# Altium PCB PCB1.PcbDoc (part 1 of 2)
Units mm, origin at the board's own origin, x right, y up, seen from the top; angles counter-clockwise.
Board outline 20 x 26.04 mm, 2 copper layers (Top Layer, Bottom Layer); 21 components, 12 nets, 62 pads, 45 vias.
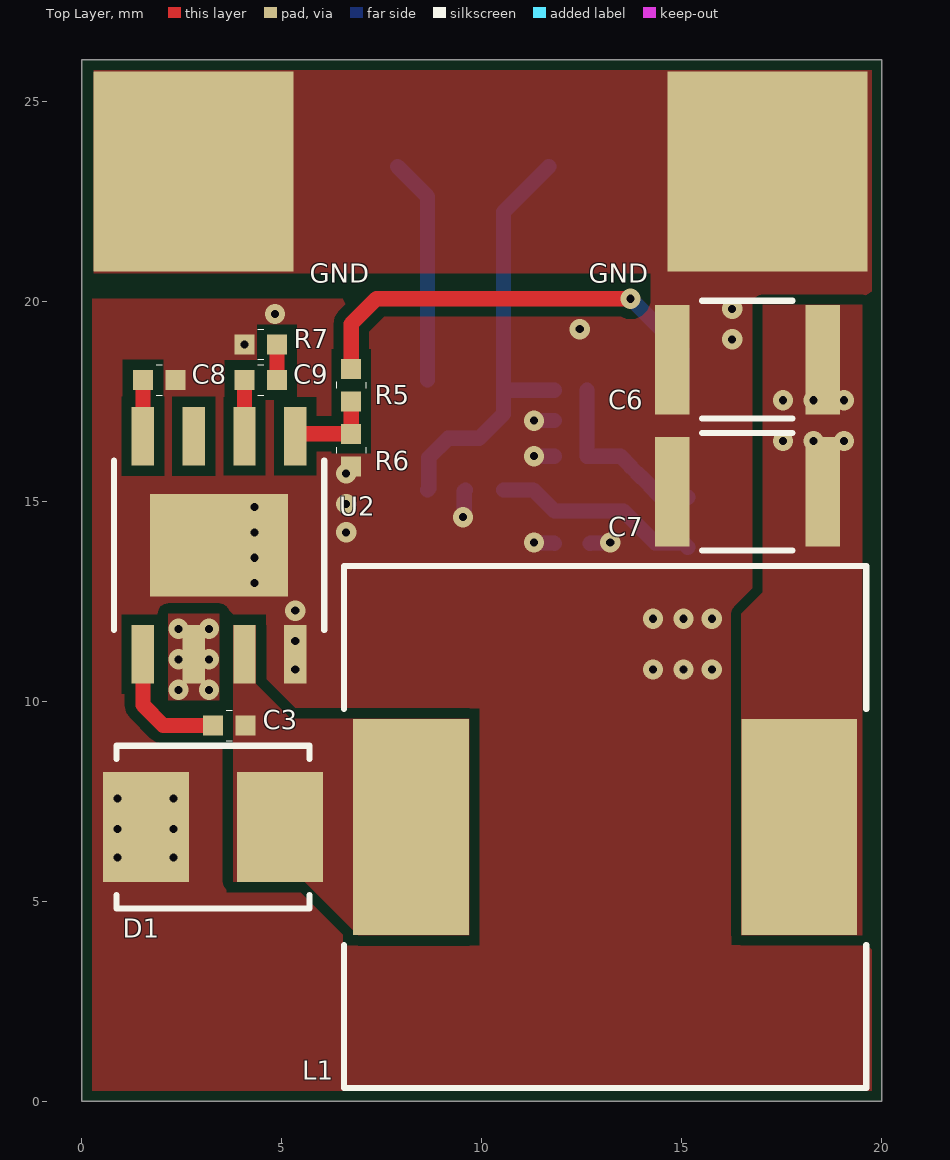
[diagram p0: Top Layer view]
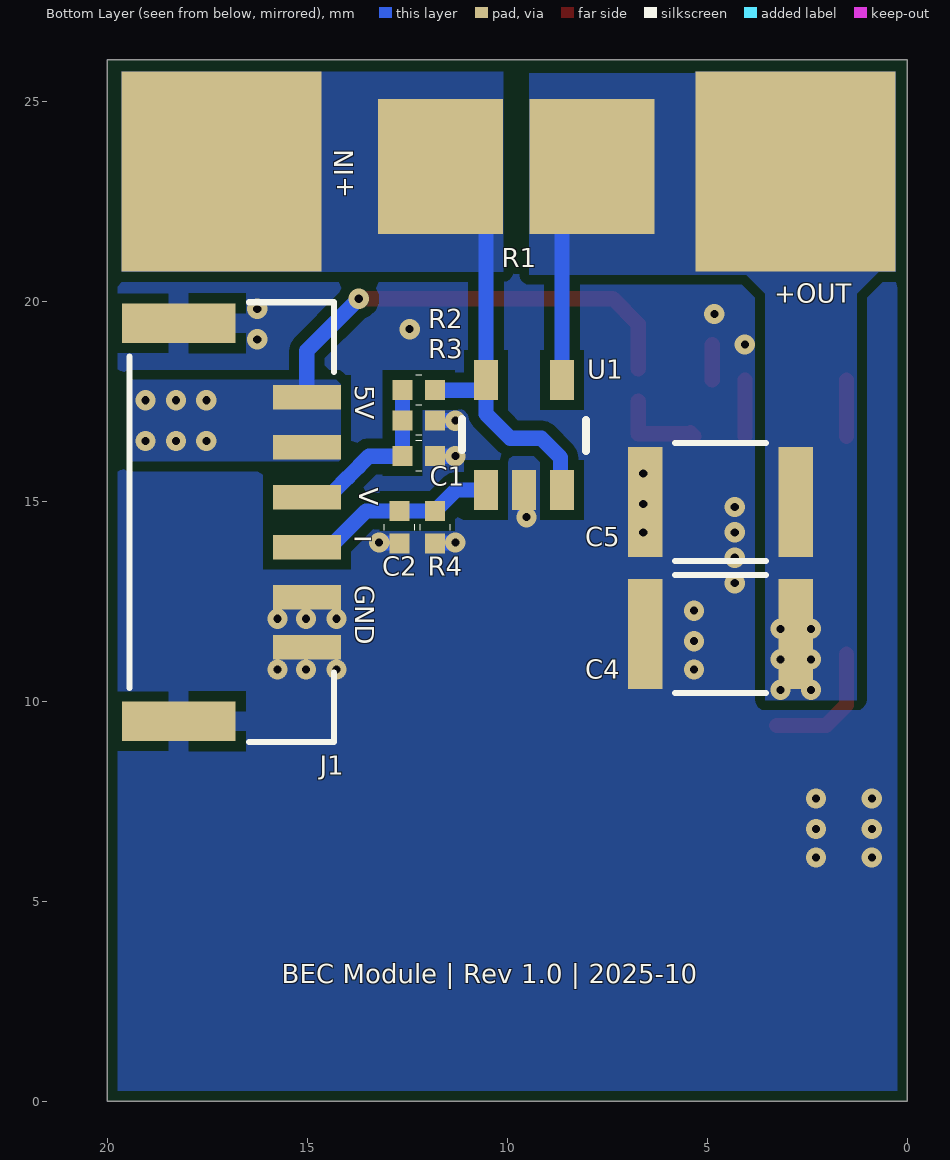
[diagram p1: Bottom Layer view, seen from below]
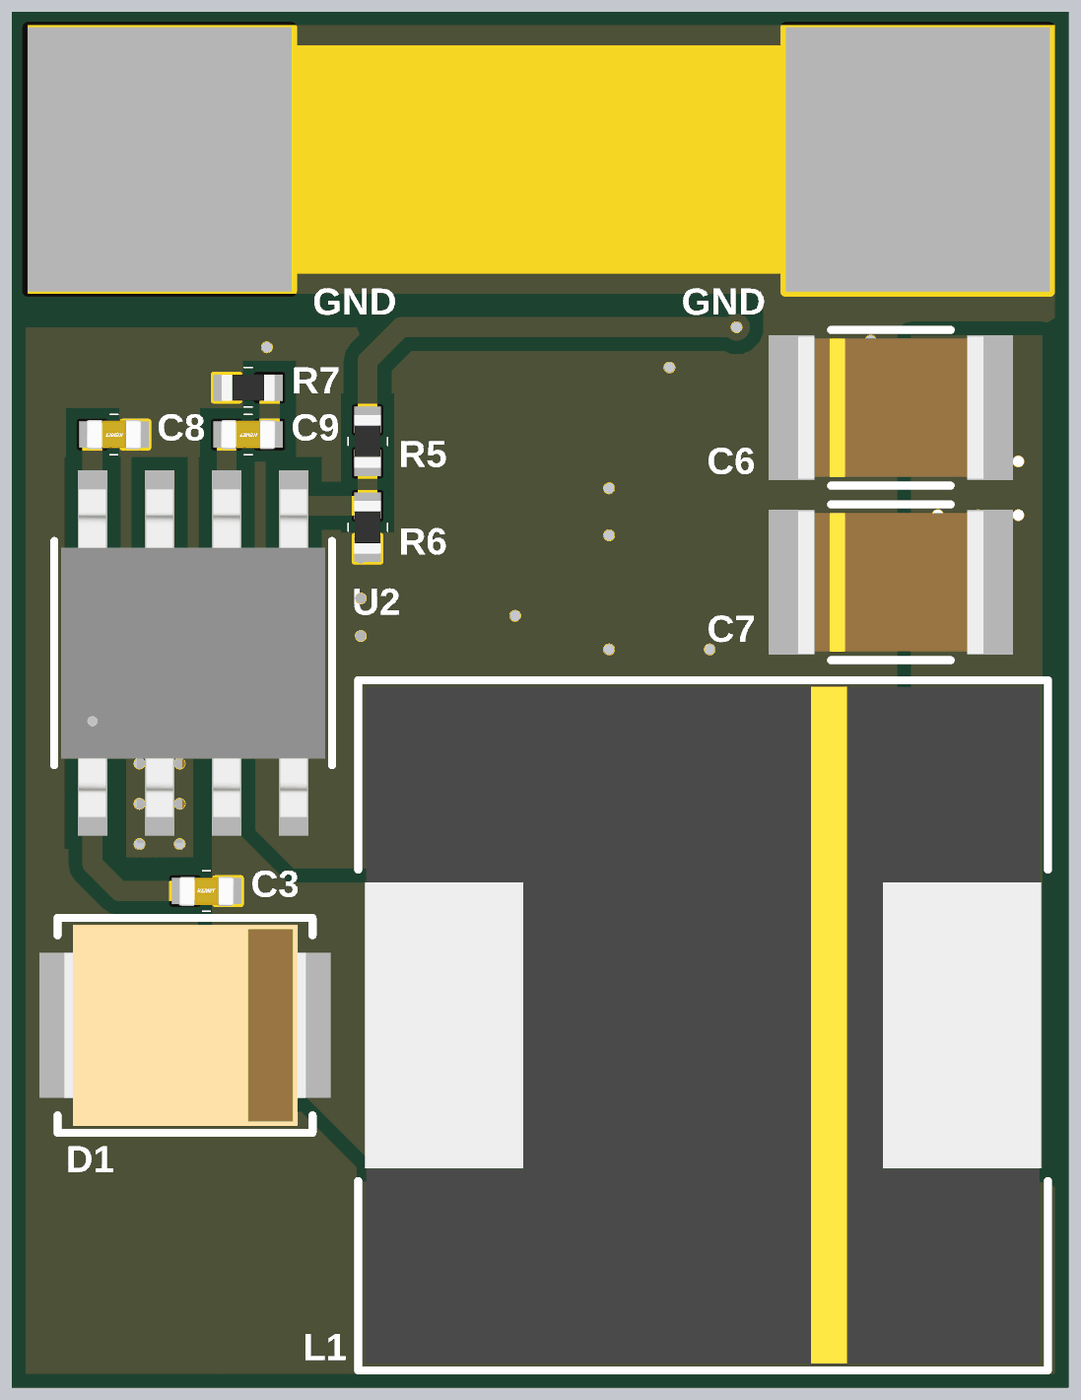
[diagram p2: 3D render of the assembled board from above, using the file's embedded part models]
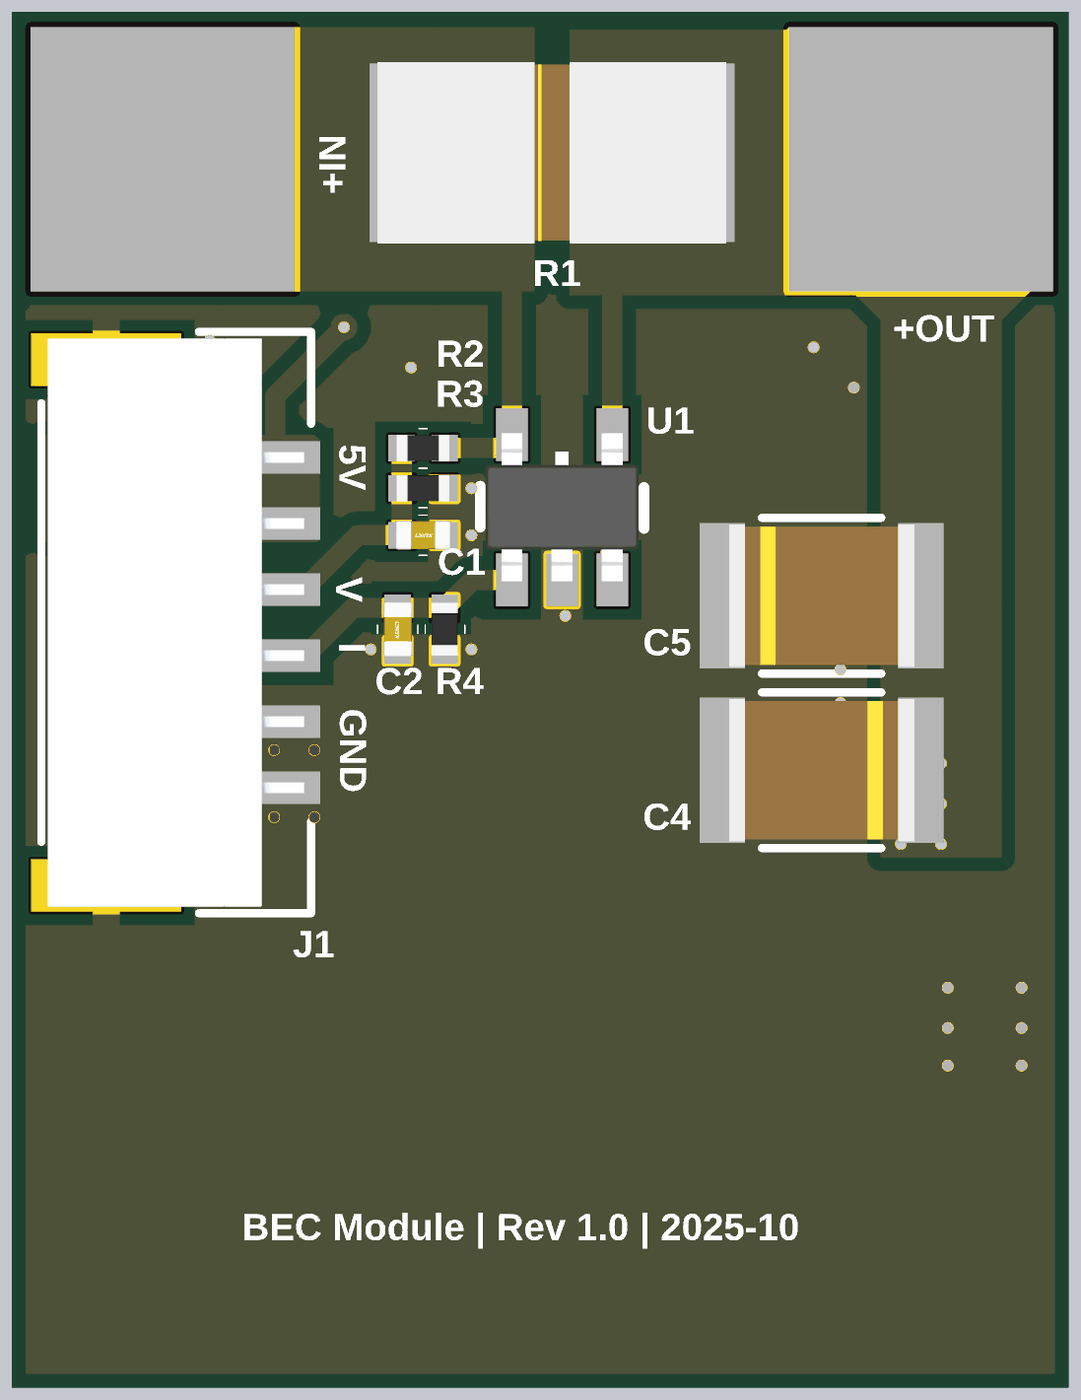
[diagram p3: 3D render of the assembled board from below, using the file's embedded part models]

## Layer stack, top to bottom
Top Solder: solder mask 0.0102, Solder Resist, Dk 3.5
Top Layer: signal copper 0.0356
Dielectric 1: dielectric 0.32, FR-4, Dk 4.8
Bottom Layer: signal copper 0.0356
Bottom Solder: solder mask 0.0102, Solder Resist, Dk 3.5

## Board outline
0,0 0,26.035 20,26.035 20,0

## Design rules (kind name [scope] priority, off if disabled: settings)
BoardOutlineClearance [All] p1: gap=0.254 ignorepadtopadclearanceinfootprint=FALSE except(0: Arc-SplitContinuation Track-SplitContinuation SMDPad-SplitContinuation THPad-SplitContinuation Via-SplitContinuation Fill-SplitContinuation Poly-SplitContinuation Region-SplitContinuation Text-SplitContinuation)
Clearance [All] p1: gap=0.254 ignorepadtopadclearanceinfootprint=FALSE
HoleSize [All] p1: absolutevalues=TRUE maxlimit=2.54 minlimit=0.152 maxpercent=80.000 minpercent=20.000
MinimumAnnularRing [All] p1: minimumring=0.152
MinimumSolderMaskSliver [All] p1: minsoldermaskwidth=0.102
PolygonConnect [All] p1: connectstyle=Direct reliefconductorwidth=0.254 reliefentries=4 polygonreliefangle="90 Angle" airgapwidth=0.254
RoutingVias [All] p1: holewidth=0.203 width=0.508 viastyle="Through Hole" minholewidth=0.152 minwidth=0.406 maxholewidth=0.711 maxwidth=1.016
SilkToSilkClearance [All] p1: silktosilkclearance=0.152
SilkToSolderMaskClearance [IsPad] p1: minsilkscreentomaskgap=0.102 clearancetoexposedcopper=TRUE
SolderMaskExpansion [All] p1: expansion=0.102 istentingtop=FALSE
SupplyNets "Schematic Supply Nets" [InNet('GND')] p1: voltage=0.000
ViasUnderSMD [All] p1: allowed=TRUE
Width [All] p1: maxlimit=1.016 minlimit=0.152 preferedwidth=0.254
26 further rules are at their usual default settings.

## Components (designator, comment, footprint, x,y, rotation, side; value= is the part's Value field where it differs from the comment)
C1 "CC0402KRX7R9BB104" CAP_0402 12.217,16.129 r0 bottom value=100nF
C2 "CC0402KRX7R9BB104" CAP_0402 12.7,14.351 r90 bottom value=100nF
C3 "C0402C103K5RACTU" CAP_0402 3.683,9.398 r0 top value=10nF
C4 "CC1210KKX7R9BB106" CAP_1210 4.674,11.684 r0 bottom value=10µF
C5 "CC1210KKX7R9BB106" CAP_1210 4.674,14.986 r180 bottom value=10µF
C6 "GRM32ER71E226ME15L" CAP_1210 16.637,18.542 r0 top
C7 "GRM32ER71E226ME15L" CAP_1210 16.637,15.24 r0 top
C8 "CC0402KRX7R9BB104" CAP_0402 1.93,18.034 r180 top value=100nF
C9 "C0402C103K5RACTU" CAP_0402 4.47,18.034 r180 top value=10nF
D1 "SS34" SMB_ONS 3.277,6.858 r180 top
J1 "SM06B-GHS-TB" CONN_SM06B-GHS-TB_JST 16.891,14.478 r270 bottom
L1 "SRR1260-150M" IND_BOURNS_SRR1260 13.081,6.858 r180 top
R1 "PA2512FKE7T0U5E" RES_PA2512_YAG-L 9.779,23.368 r180 bottom
R2 "ERJ-2RKF1372X" RES_0402 12.217,17.78 r0 bottom value=13.7kΩ
R3 "ERJ-2GEJ152X" RES_0402 12.217,17.018 r180 bottom value=1.5kΩ
R4 "ERJ-2GEJ104X" RES_0402 11.811,14.351 r270 bottom value=100kΩ
R5 "CRGP0402F33K" RES_0402 6.731,17.907 r270 top value=33kΩ
R6 "CRGP0402F10K" RES_0402 6.731,16.281 r270 top value=10kΩ
R7 "RK73H1ETTP7501F" RES_0402 4.47,18.923 r0 top value=7.5kΩ
U1 "INA139NA/250" DBV0005A_N 9.586,16.659 r90 bottom
U2 "MP1593DN-LF-Z" SOIC8E_MNP 3.429,13.9 r90 top

## Footprints (in the part's own frame and the unit in brackets; to place one, negate y for a bottom-side part, rotate by r counter-clockwise, add the part's x,y. Pads: shape width x height; smd on the part's side, far side on the other; paste and mask are expansions set on the pad)
CAP_0402 [mm] "Capacitor"
  rect 0.5x0.5 smd mask+0.051: 1(-0.406,0) 2(0.406,0)
  silkscreen extent -0.08,-0.38 0.08,0.38, body extent -0.53,-0.28 0.52,0.27, height 0.55
CAP_1210 [mil]
  rect 34x108 smd paste+0 mask+0: 1(-74,0) 2(74,0)
  silkscreen extent -45,-58 45,58, body extent -69,-53 69,53, height 106
CONN_SM06B-GHS-TB_JST [mil]
  rect 24x67 smd paste+0 mask+0: 1(-123.03,73.85) 2(-73.82,73.85) 3(-24.61,73.85) 4(24.61,73.85) 5(73.82,73.85) 6(123.03,73.85)
  rect 39x112 smd paste-56 mask+2: 7(-195.87,-52.14) 8(195.87,-52.14)
  silkscreen extent -216,-101 217,101, body extent -212,-96 212,95, height 167
DBV0005A_N [mm]
  rect 1x0.6 smd paste+0 mask+0.051: 1(-1.375,0.95) 2(-1.375,0) 3(-1.375,-0.95) 4(1.375,-0.95) 5(1.375,0.95)
  silkscreen extent -0.4,-1.55 0.4,1.55, body extent -1.4,-1.45 1.4,1.45, height 1.2
IND_BOURNS_SRR1260 [mil]
  rect 114x213 smd paste+0 mask+0: 1(-191,0) 2(191,0)
  silkscreen extent -257,-257 257,257, body extent -252,-252 252,252, height 256
RES_0402 [mm]
  rect 0.5x0.5 smd mask+0.051: 1(-0.406,0) 2(0.406,0)
  silkscreen extent -0.08,-0.37 0.08,0.38, body extent -0.5,-0.25 0.5,0.25, height 0.3
RES_PA2512_YAG-L [mil]
  rect 123x133 smd paste+0 mask+0: 1(-74.5,0) 2(74.5,0)
  body extent -130,-67 130,67, height 35
SMB_ONS [mil]
  rect 85x108 smd paste+0 mask+0: 1(-66,0) 2(66,0)
  silkscreen extent -95,-80 95,80, body extent -90,-75 90,75, height 97
SOIC8E_MNP [mil]
  rect 57.5x22 smd paste+0 mask+0: 1(-107.25,75) 2(-107.25,25) 3(-107.25,-25) 4(-107.25,-75) 5(107.25,-75) 6(107.25,-25) 7(107.25,25) 8(107.25,75)
  rect 101x136 smd paste-67.5 mask+0: EPAD(0,0)
  silkscreen extent -84,-104 84,104, body extent -122,-99 122,99, height 67

## Part data
C1 C2 C8: "50V 100nF X7R ±10% 0402 Multilayer Ceramic Capacitors MLCC - SMD/SMT ROHS", Case/Package=0402, Dielectric=X7R, Dielectric Material=Ceramic, Manufacturer="Yageo Group", Max Operating Temperature=125°C, Min Operating Temperature=-55°C, Supplier Part Number=311-3566-1-ND, Temperature Coefficient=30ppm/°C, Tolerance=10%, Voltage Rating=50V, Category="Ceramic Capacitors", China RoHS=Compliant, ComponentLink1Description=https://datasheet.octopart.com:443/CC0402KRX7R9BB104-Yageo-datasheet-177165144.pdf?src-supplier=IHS, ComponentLink1URL=https://datasheet.octopart.com:443/CC0402KRX7R9BB104-Yageo-datasheet-177165144.pdf?src-supplier=IHS, ComponentLink2Description=https://datasheet.octopart.com:443/CC0402KRX7R9BB104-Yageo-datasheet-78855684.pdf?src-supplier=Upverter, ComponentLink2URL=https://datasheet.octopart.com:443/CC0402KRX7R9BB104-Yageo-datasheet-78855684.pdf?src-supplier=Upverter, ComponentLink3Description=https://datasheet.octopart.com:443/CC0402KRX7R9BB104-Yageo-datasheet-181967451.pdf?src-supplier=Newark, ComponentLink3URL=https://datasheet.octopart.com:443/CC0402KRX7R9BB104-Yageo-datasheet-181967451.pdf?src-supplier=Newark, ComponentLink4Description=https://datasheet.octopart.com:443/CC0402KRX7R9BB104-Yageo-datasheet-140260305.pdf?src-supplier=Newark, ComponentLink4URL=https://datasheet.octopart.com:443/CC0402KRX7R9BB104-Yageo-datasheet-140260305.pdf?src-supplier=Newark, ComponentLink5Description=https://datasheet.octopart.com:443/CC0402KRX7R9BB104-Yageo-datasheet-147453679.pdf?src-supplier=Farnell, ComponentLink5URL=https://datasheet.octopart.com:443/CC0402KRX7R9BB104-Yageo-datasheet-147453679.pdf?src-supplier=Farnell, ComponentLink6Description=https://datasheet.octopart.com/CC0402KRX7R9BB104-Yageo-datasheet-10883670.pdf, ComponentLink6URL=https://datasheet.octopart.com/CC0402KRX7R9BB104-Yageo-datasheet-10883670.pdf, ComponentLink7Description=https://datasheet.octopart.com/Surface-Mount-Ceramic-Multilayer-Capacitors%3B-General-Purpose-%26-High-Capacitance-Class-2%2C-X7R-Yageo-datasheet-family-114.pdf, ComponentLink7URL=https://datasheet.octopart.com/Surface-Mount-Ceramic-Multilayer-Capacitors%3B-General-Purpose-%26-High-Capacitance-Class-2%2C-X7R-Yageo-datasheet-family-114.pdf, ComponentLink8Description=https://datasheet.octopart.com:443/CC0402KRX7R9BB104-Yageo-datasheet-166511530.pdf?src-supplier=Future+Electronics, ComponentLink8URL=https://datasheet.octopart.com:443/CC0402KRX7R9BB104-Yageo-datasheet-166511530.pdf?src-supplier=Future+Electronics, ComponentLink9Description=https://datasheet.octopart.com:443/CC0402KRX7R9BB104-Yageo-datasheet-137700082.pdf?src-supplier=Future+Electronics, ComponentLink9URL=https://datasheet.octopart.com:443/CC0402KRX7R9BB104-Yageo-datasheet-137700082.pdf?src-supplier=Future+Electronics, ComponentLink10Description=https://datasheet.octopart.com:443/CC0402KRX7R9BB104-Yageo-datasheet-137700084.pdf?src-supplier=Future+Electronics, ComponentLink10URL=https://datasheet.octopart.com:443/CC0402KRX7R9BB104-Yageo-datasheet-137700084.pdf?src-supplier=Future+Electronics, ComponentLink11Description=https://datasheet.octopart.com:443/CC0402KRX7R9BB104-Yageo-datasheet-42079887.pdf?src-supplier=Future+Electronics, ComponentLink11URL=https://datasheet.octopart.com:443/CC0402KRX7R9BB104-Yageo-datasheet-42079887.pdf?src-supplier=Future+Electronics, ComponentLink12Description=https://datasheet.octopart.com:443/CC0402KRX7R9BB104-Yageo-datasheet-178018857.pdf?src-supplier=Burklin+Elektronik, ComponentLink12URL=https://datasheet.octopart.com:443/CC0402KRX7R9BB104-Yageo-datasheet-178018857.pdf?src-supplier=Burklin+Elektronik, ComponentLink13Description=https://datasheet.octopart.com:443/CC0402KRX7R9BB104-Yageo-Group-datasheet-165992755.pdf?src-supplier=ODG+(Origin+Data+Global), ComponentLink13URL=https://datasheet.octopart.com:443/CC0402KRX7R9BB104-Yageo-Group-datasheet-165992755.pdf?src-supplier=ODG+(Origin+Data+Global), ComponentLink14Description=https://datasheet.octopart.com:443/CC0402KRX7R9BB104-Yageo-datasheet-151948686.pdf?src-supplier=TME, ComponentLink14URL=https://datasheet.octopart.com:443/CC0402KRX7R9BB104-Yageo-datasheet-151948686.pdf?src-supplier=TME, ComponentLink15Description=https://datasheet.octopart.com:443/CC0402KRX7R9BB104-Yageo-datasheet-120101875.pdf?src-supplier=Megastar, ComponentLink15URL=https://datasheet.octopart.com:443/CC0402KRX7R9BB104-Yageo-datasheet-120101875.pdf?src-supplier=Megastar, ComponentLink16Description=http://sigma.octopart.com:80/rohs_statement/Surface-Mount-Ceramic-Multilayer-Capacitors%3B-General-Purpose-%26-High-Capacitance-Class-2%2C-X7R-Yageo-family-124.pdf?src-supplier=Compliance+Statements, ComponentLink16URL=http://sigma.octopart.com:80/rohs_statement/Surface-Mount-Ceramic-Multilayer-Capacitors%3B-General-Purpose-%26-High-Capacitance-Class-2%2C-X7R-Yageo-family-124.pdf?src-supplier=Compliance+Statements, ComponentLink17Description=http://sigma.octopart.com:80/reach_statement/Surface-Mount-Ceramic-Multilayer-Capacitors%3B-General-Purpose-%26-High-Capacitance-Class-2%2C-X7R-Yageo-family-125.pdf?src-supplier=Compliance+Statements, ComponentLink17URL=http://sigma.octopart.com:80/reach_statement/Surface-Mount-Ceramic-Multilayer-Capacitors%3B-General-Purpose-%26-High-Capacitance-Class-2%2C-X7R-Yageo-family-125.pdf?src-supplier=Compliance+Statements, ComponentLink18Description=http://sigma.octopart.com:80/conflict_mineral_statement/Yageo-company-3.pdf?src-supplier=Compliance+Statements, ComponentLink18URL=http://sigma.octopart.com:80/conflict_mineral_statement/Yageo-company-3.pdf?src-supplier=Compliance+Statements, ComponentLink19Description=http://sigma.octopart.com:80/rohs_statement/Yageo-company-2.pdf?src-supplier=Compliance+Statements, ComponentLink19URL=http://sigma.octopart.com:80/rohs_statement/Yageo-company-2.pdf?src-supplier=Compliance+Statements, Halogen Free="Halogen Free", Height=500µm, Lead Free="Lead Free", Length=1mm, Lifecycle Status=Production, Manufacturer Part Number=CC0402KRX7R9BB104, Material=Ceramic, Mounting Technology="Surface Mount", Number of Terminals=2, Pricing="1=0.08, 10=0.025, 50=0.0168, 100=0.012, 500=0.01084 (USD)", REACH SVHC=Yes, RoHS=Compliant, Schedule B="8532240020, 8532240020|8532240020, 8532240020|8532240020|8532240020, 8532240020|8532240020|8532240020|8532240020", Stock=948996, Supplier=DigiKey, Thickness=558.8µm, Voltage Rating (DC)=50V, Width=500µm
C3 C9: "Multilayer Ceramic Capacitors MLCC - SMD/SMT 50V 0.01uF X7R 0402 10%", Case Code (Imperial)=0402, Dielectric=X7R, Dielectric Material=Ceramic, Manufacturer=KEMET, Max Operating Temperature=125°C, Min Operating Temperature=-55°C, Supplier Part Number=399-C0402C103K5RACTUDKR-ND, Tolerance=10%, Voltage=50V, Case/Package=0402, Category="Ceramic Capacitors", China RoHS=Compliant, ComponentLink1Description=https://datasheet.octopart.com:443/C0402C103K5RAC7867-KEMET-datasheet-179093040.pdf?src-supplier=IHS, ComponentLink1URL=https://datasheet.octopart.com:443/C0402C103K5RAC7867-KEMET-datasheet-179093040.pdf?src-supplier=IHS, ComponentLink2Description=https://datasheet.octopart.com:443/C0402C103K5RACTU-KEMET-datasheet-137357759.pdf?src-supplier=Master+Electronics, ComponentLink2URL=https://datasheet.octopart.com:443/C0402C103K5RACTU-KEMET-datasheet-137357759.pdf?src-supplier=Master+Electronics, ComponentLink3Description=https://datasheet.octopart.com:443/C0402C103K5RACTU-KEMET-datasheet-178445679.pdf?src-supplier=Farnell, ComponentLink3URL=https://datasheet.octopart.com:443/C0402C103K5RACTU-KEMET-datasheet-178445679.pdf?src-supplier=Farnell, ComponentLink4Description=https://datasheet.octopart.com:443/C0402C103K5RACTU-KEMET-datasheet-149521615.pdf?src-supplier=Farnell, ComponentLink4URL=https://datasheet.octopart.com:443/C0402C103K5RACTU-KEMET-datasheet-149521615.pdf?src-supplier=Farnell, ComponentLink5Description=https://datasheet.octopart.com:443/C0402C103K5RACTU-KEMET-datasheet-101575465.pdf?src-supplier=Farnell, ComponentLink5URL=https://datasheet.octopart.com:443/C0402C103K5RACTU-KEMET-datasheet-101575465.pdf?src-supplier=Farnell, ComponentLink6Description=https://datasheet.octopart.com:443/C0402C103K5RACTU-KEMET-datasheet-176142082.pdf?src-supplier=Farnell, ComponentLink6URL=https://datasheet.octopart.com:443/C0402C103K5RACTU-KEMET-datasheet-176142082.pdf?src-supplier=Farnell, ComponentLink7Description=https://datasheet.octopart.com:443/C0402C103K5RACTU-Kemet-datasheet-14356739.pdf?src-supplier=Farnell, ComponentLink7URL=https://datasheet.octopart.com:443/C0402C103K5RACTU-Kemet-datasheet-14356739.pdf?src-supplier=Farnell, ComponentLink8Description=https://datasheet.octopart.com:443/C0402C103K5RAC-TU-Kemet-datasheet-7833651.pdf?src-supplier=Farnell, ComponentLink8URL=https://datasheet.octopart.com:443/C0402C103K5RAC-TU-Kemet-datasheet-7833651.pdf?src-supplier=Farnell, ComponentLink9Description=https://datasheet.octopart.com:443/C0402C103K5RAC-TU-Kemet-datasheet-7601896.pdf?src-supplier=Farnell, ComponentLink9URL=https://datasheet.octopart.com:443/C0402C103K5RAC-TU-Kemet-datasheet-7601896.pdf?src-supplier=Farnell, ComponentLink10Description=https://datasheet.octopart.com:443/C0402C103K5RAC-TU-Kemet-datasheet-5316294.pdf?src-supplier=Farnell, ComponentLink10URL=https://datasheet.octopart.com:443/C0402C103K5RAC-TU-Kemet-datasheet-5316294.pdf?src-supplier=Farnell, ComponentLink11Description=https://datasheet.octopart.com:443/C0402C103K5RAC-TU-Kemet-datasheet-5314837.pdf?src-supplier=Farnell, ComponentLink11URL=https://datasheet.octopart.com:443/C0402C103K5RAC-TU-Kemet-datasheet-5314837.pdf?src-supplier=Farnell, ComponentLink12Description=https://datasheet.octopart.com:443/C0402C103K5RAC-TU-Kemet-datasheet-8092359.pdf?src-supplier=Farnell, ComponentLink12URL=https://datasheet.octopart.com:443/C0402C103K5RAC-TU-Kemet-datasheet-8092359.pdf?src-supplier=Farnell, ComponentLink13Description=https://datasheet.octopart.com:443/C0402C103K5RAC-TU-Kemet-datasheet-5314449.pdf?src-supplier=Farnell, ComponentLink13URL=https://datasheet.octopart.com:443/C0402C103K5RAC-TU-Kemet-datasheet-5314449.pdf?src-supplier=Farnell, ComponentLink14Description=https://datasheet.octopart.com:443/C0402C103K5RAC-TU-Kemet-datasheet-5314969.pdf?src-supplier=Farnell, ComponentLink14URL=https://datasheet.octopart.com:443/C0402C103K5RAC-TU-Kemet-datasheet-5314969.pdf?src-supplier=Farnell, ComponentLink15Description=https://datasheet.octopart.com:443/C0402C103K5RAC-TU-Kemet-datasheet-5314627.pdf?src-supplier=Farnell, ComponentLink15URL=https://datasheet.octopart.com:443/C0402C103K5RAC-TU-Kemet-datasheet-5314627.pdf?src-supplier=Farnell, ComponentLink16Description=https://datasheet.octopart.com:443/C0402C103K5RAC-TU-Kemet-datasheet-5389132.pdf?src-supplier=Farnell, ComponentLink16URL=https://datasheet.octopart.com:443/C0402C103K5RAC-TU-Kemet-datasheet-5389132.pdf?src-supplier=Farnell, ComponentLink17Description=https://datasheet.octopart.com:443/C0402C103K5RAC-TU-Kemet-datasheet-5313836.pdf?src-supplier=Farnell, ComponentLink17URL=https://datasheet.octopart.com:443/C0402C103K5RAC-TU-Kemet-datasheet-5313836.pdf?src-supplier=Farnell, ComponentLink18Description=https://datasheet.octopart.com:443/C0402C103K5RAC-TU-Kemet-datasheet-8111010.pdf?src-supplier=Farnell, ComponentLink18URL=https://datasheet.octopart.com:443/C0402C103K5RAC-TU-Kemet-datasheet-8111010.pdf?src-supplier=Farnell, ComponentLink19Description=https://datasheet.octopart.com:443/C0402C103K5RAC-TU-Kemet-datasheet-7627733.pdf?src-supplier=Farnell, ComponentLink19URL=https://datasheet.octopart.com:443/C0402C103K5RAC-TU-Kemet-datasheet-7627733.pdf?src-supplier=Farnell, ComponentLink20Description=https://datasheet.octopart.com:443/C0402C103K5RACTU-Kemet-datasheet-500041.pdf?src-supplier=Farnell, ComponentLink20URL=https://datasheet.octopart.com:443/C0402C103K5RACTU-Kemet-datasheet-500041.pdf?src-supplier=Farnell, ComponentLink21Description=https://datasheet.octopart.com:443/C0402C103K5RAC-TU-Kemet-datasheet-5315946.pdf?src-supplier=Farnell, ComponentLink21URL=https://datasheet.octopart.com:443/C0402C103K5RAC-TU-Kemet-datasheet-5315946.pdf?src-supplier=Farnell, ComponentLink22Description=https://datasheet.octopart.com:443/C0402C103K5RACTU-KEMET-datasheet-32036385.pdf?src-supplier=Electro+Sonic, ComponentLink22URL=https://datasheet.octopart.com:443/C0402C103K5RACTU-KEMET-datasheet-32036385.pdf?src-supplier=Electro+Sonic, ComponentLink23Description=https://datasheet.octopart.com:443/C0402C103K5RACTU-KEMET-datasheet-157246124.pdf?src-supplier=Electro+Sonic, ComponentLink23URL=https://datasheet.octopart.com:443/C0402C103K5RACTU-KEMET-datasheet-157246124.pdf?src-supplier=Electro+Sonic, ComponentLink24Description=https://datasheet.octopart.com:443/C0402C103K5RAC-TU-Kemet-datasheet-5313890.pdf?src-supplier=Newark, ComponentLink24URL=https://datasheet.octopart.com:443/C0402C103K5RAC-TU-Kemet-datasheet-5313890.pdf?src-supplier=Newark, ComponentLink25Description=https://datasheet.octopart.com:443/C0402C103K5RAC-TU-Kemet-datasheet-5390537.pdf?src-supplier=Newark, ComponentLink25URL=https://datasheet.octopart.com:443/C0402C103K5RAC-TU-Kemet-datasheet-5390537.pdf?src-supplier=Newark, ComponentLink26Description=https://datasheet.octopart.com:443/C0402C103K5RAC-TU-Kemet-datasheet-7541751.pdf?src-supplier=Newark, ComponentLink26URL=https://datasheet.octopart.com:443/C0402C103K5RAC-TU-Kemet-datasheet-7541751.pdf?src-supplier=Newark, ComponentLink27Description=https://datasheet.octopart.com:443/C0402C103K5RACTU-KEMET-datasheet-168262798.pdf?src-supplier=Newark, ComponentLink27URL=https://datasheet.octopart.com:443/C0402C103K5RACTU-KEMET-datasheet-168262798.pdf?src-supplier=Newark, ComponentLink28Description=https://datasheet.octopart.com:443/C0402C103K5RACTU-KEMET-datasheet-130256537.pdf?src-supplier=Newark, ComponentLink28URL=https://datasheet.octopart.com:443/C0402C103K5RACTU-KEMET-datasheet-130256537.pdf?src-supplier=Newark, ComponentLink29Description=https://datasheet.octopart.com:443/C0402C103K5RACTU-Kemet-datasheet-8764837.pdf?src-supplier=Newark, ComponentLink29URL=https://datasheet.octopart.com:443/C0402C103K5RACTU-Kemet-datasheet-8764837.pdf?src-supplier=Newark, ComponentLink30Description=https://datasheet.octopart.com:443/C0402C103K5RACTU-Kemet-datasheet-8480123.pdf?src-supplier=Newark, ComponentLink30URL=https://datasheet.octopart.com:443/C0402C103K5RACTU-Kemet-datasheet-8480123.pdf?src-supplier=Newark, ComponentLink31Description=https://datasheet.octopart.com:443/C0402C103K5RACTU-Kemet-datasheet-5393970.pdf?src-supplier=Newark, ComponentLink31URL=https://datasheet.octopart.com:443/C0402C103K5RACTU-Kemet-datasheet-5393970.pdf?src-supplier=Newark, ComponentLink32Description=https://datasheet.octopart.com:443/C0402C103K5RACTU-Kemet-datasheet-8502025.pdf?src-supplier=Newark, ComponentLink32URL=https://datasheet.octopart.com:443/C0402C103K5RACTU-Kemet-datasheet-8502025.pdf?src-supplier=Newark, ComponentLink33Description=https://datasheet.octopart.com:443/C0402C103K5RACTU-Kemet-datasheet-161801.pdf?src-supplier=Newark, ComponentLink33URL=https://datasheet.octopart.com:443/C0402C103K5RACTU-Kemet-datasheet-161801.pdf?src-supplier=Newark, ComponentLink34Description=https://datasheet.octopart.com:443/C0402C103K5RACTU-Kemet-datasheet-12608295.pdf?src-supplier=element14+APAC, ComponentLink34URL=https://datasheet.octopart.com:443/C0402C103K5RACTU-Kemet-datasheet-12608295.pdf?src-supplier=element14+APAC, ComponentLink35Description=https://datasheet.octopart.com:443/C0402C103K5RACTU-Kemet-datasheet-11992184.pdf?src-supplier=element14+APAC, ComponentLink35URL=https://datasheet.octopart.com:443/C0402C103K5RACTU-Kemet-datasheet-11992184.pdf?src-supplier=element14+APAC, ComponentLink36Description=https://datasheet.octopart.com:443/C0402C103K5RACTU-Kemet-datasheet-10942409.pdf?src-supplier=element14+APAC, ComponentLink36URL=https://datasheet.octopart.com:443/C0402C103K5RACTU-Kemet-datasheet-10942409.pdf?src-supplier=element14+APAC, ComponentLink37Description=https://datasheet.octopart.com:443/C0402C103K5RACTU-Kemet-datasheet-10404442.pdf?src-supplier=element14+APAC, ComponentLink37URL=https://datasheet.octopart.com:443/C0402C103K5RACTU-Kemet-datasheet-10404442.pdf?src-supplier=element14+APAC, ComponentLink38Description=https://datasheet.octopart.com:443/C0402C103K5RACTU-KEMET-datasheet-164512540.pdf?src-supplier=TME, ComponentLink38URL=https://datasheet.octopart.com:443/C0402C103K5RACTU-KEMET-datasheet-164512540.pdf?src-supplier=TME, ComponentLink39Description=https://datasheet.octopart.com:443/C0402C103K5RACTU-Kemet-datasheet-67501989.pdf?src-supplier=TME, ComponentLink39URL=https://datasheet.octopart.com:443/C0402C103K5RACTU-Kemet-datasheet-67501989.pdf?src-supplier=TME, ComponentLink40Description=https://datasheet.octopart.com:443/C0402C103K5RACTU-KEMET-datasheet-68331906.pdf?src-supplier=TME, ComponentLink40URL=https://datasheet.octopart.com:443/C0402C103K5RACTU-KEMET-datasheet-68331906.pdf?src-supplier=TME, ComponentLink41Description=https://datasheet.octopart.com:443/C0402C103K5RAC7867-Kemet-datasheet-62098571.pdf?src-supplier=TME, ComponentLink41URL=https://datasheet.octopart.com:443/C0402C103K5RAC7867-Kemet-datasheet-62098571.pdf?src-supplier=TME, ComponentLink42Description=https://datasheet.octopart.com:443/C0402C103K5RACTU-KEMET-datasheet-110724412.pdf?src-supplier=RS+(Formerly+Allied+Electronics), ComponentLink42URL=https://datasheet.octopart.com:443/C0402C103K5RACTU-KEMET-datasheet-110724412.pdf?src-supplier=RS+(Formerly+Allied+Electronics), ComponentLink43Description=https://datasheet.octopart.com:443/C0402C103K5RACTU-Kemet-datasheet-464.pdf?src-supplier=RS+(Formerly+Allied+Electronics), ComponentLink43URL=https://datasheet.octopart.com:443/C0402C103K5RACTU-Kemet-datasheet-464.pdf?src-supplier=RS+(Formerly+Allied+Electronics), ComponentLink44Description=https://datasheet.octopart.com/C0402C103K5RACTU-KEMET-datasheet-84169754.pdf, ComponentLink44URL=https://datasheet.octopart.com/C0402C103K5RACTU-KEMET-datasheet-84169754.pdf, ComponentLink45Description=https://datasheet.octopart.com:443/C0402C103K5RACTU-Kemet-datasheet-11859415.pdf?src-supplier=Arrow+Electronics, ComponentLink45URL=https://datasheet.octopart.com:443/C0402C103K5RACTU-Kemet-datasheet-11859415.pdf?src-supplier=Arrow+Electronics, ComponentLink46Description=https://datasheet.octopart.com:443/C0402C103K5RAC-TU-Kemet-datasheet-7597978.pdf?src-supplier=Jameco, ComponentLink46URL=https://datasheet.octopart.com:443/C0402C103K5RAC-TU-Kemet-datasheet-7597978.pdf?src-supplier=Jameco, Depth=500µm, Dissipation Factor=2.5%, Height=500µm, Lead Free="Lead Free", Lead Pitch=300µm, Length=1mm, Lifecycle Status=Production, Manufacturer Part Number=C0402C103K5RACTU, Material=Ceramic, Mounting Technology="Surface Mount", Number of Terminals=2, Packaging="Cut Tape", Pins=2, Pricing="1=0.08, 10=0.004 (USD)", Radiation Hardening=No, REACH SVHC=Yes, RoHS=Compliant, Schedule B="8532240020, 8532240020|8532240020, 8532240020|8532240020|8532240020, 8532240020|8532240020|8532240020|8532240020", Stock=1084131, Supplier=DigiKey, Termination=SMD/SMT, Thickness=558.8µm, Voltage Rating=50V, Voltage Rating (AC)=50V, Voltage Rating (DC)=50V, Width=500µm
C4 C5: "50V 10uF X7R ±10% 1210 Multilayer Ceramic Capacitors MLCC - SMD/SMT ROHS", Case Code (Imperial)=1210, Case Code (Metric)=3225, Dielectric=X7R, Dielectric Material=Ceramic, Manufacturer="Yageo Group", Max Operating Temperature=125°C, Min Operating Temperature=-55°C, Supplier Part Number=311-2035-1-ND, Tolerance=10%, Voltage Rating=50V, Case/Package=1210, Category="Ceramic Capacitors", China RoHS=Compliant, ComponentLink1Description=https://datasheet.octopart.com:443/CC1210KKX7R9BB106-Yageo-datasheet-177165144.pdf?src-supplier=IHS, ComponentLink1URL=https://datasheet.octopart.com:443/CC1210KKX7R9BB106-Yageo-datasheet-177165144.pdf?src-supplier=IHS, ComponentLink2Description=https://datasheet.octopart.com:443/CC1210KKX7R9BB106-Yageo-Group-datasheet-189192896.pdf?src-supplier=TME, ComponentLink2URL=https://datasheet.octopart.com:443/CC1210KKX7R9BB106-Yageo-Group-datasheet-189192896.pdf?src-supplier=TME, ComponentLink3Description=https://datasheet.octopart.com:443/CC1210KKX7R9BB106-Yageo-Group-datasheet-188192968.pdf?src-supplier=Newark, ComponentLink3URL=https://datasheet.octopart.com:443/CC1210KKX7R9BB106-Yageo-Group-datasheet-188192968.pdf?src-supplier=Newark, ComponentLink4Description=https://datasheet.octopart.com:443/CC1210KKX7R9BB106-Yageo-datasheet-147453679.pdf?src-supplier=Farnell, ComponentLink4URL=https://datasheet.octopart.com:443/CC1210KKX7R9BB106-Yageo-datasheet-147453679.pdf?src-supplier=Farnell, ComponentLink5Description=https://datasheet.octopart.com:443/CC1210KKX7R9BB106-Yageo-datasheet-182030352.pdf?src-supplier=Farnell, ComponentLink5URL=https://datasheet.octopart.com:443/CC1210KKX7R9BB106-Yageo-datasheet-182030352.pdf?src-supplier=Farnell, ComponentLink6Description=https://datasheet.octopart.com:443/CC1210KKX7R9BB106-Yageo-datasheet-182030351.pdf?src-supplier=Farnell, ComponentLink6URL=https://datasheet.octopart.com:443/CC1210KKX7R9BB106-Yageo-datasheet-182030351.pdf?src-supplier=Farnell, ComponentLink7Description=https://datasheet.octopart.com:443/CC1210KKX7R9BB106-Yageo-Group-datasheet-188689702.pdf?src-supplier=Farnell, ComponentLink7URL=https://datasheet.octopart.com:443/CC1210KKX7R9BB106-Yageo-Group-datasheet-188689702.pdf?src-supplier=Farnell, ComponentLink8Description=https://datasheet.octopart.com:443/CC1210KKX7R9BB106-Yageo-datasheet-151948686.pdf?src-supplier=Farnell, ComponentLink8URL=https://datasheet.octopart.com:443/CC1210KKX7R9BB106-Yageo-datasheet-151948686.pdf?src-supplier=Farnell, ComponentLink9Description=https://datasheet.octopart.com:443/CC1210KKX7R9BB106-Yageo-datasheet-166511530.pdf?src-supplier=Future+Electronics, ComponentLink9URL=https://datasheet.octopart.com:443/CC1210KKX7R9BB106-Yageo-datasheet-166511530.pdf?src-supplier=Future+Electronics, ComponentLink10Description=https://datasheet.octopart.com:443/CC1210KKX7R9BB106-Yageo-datasheet-137700084.pdf?src-supplier=Future+Electronics, ComponentLink10URL=https://datasheet.octopart.com:443/CC1210KKX7R9BB106-Yageo-datasheet-137700084.pdf?src-supplier=Future+Electronics, ComponentLink11Description=https://datasheet.octopart.com:443/CC1210KKX7R9BB106-Yageo-datasheet-42079887.pdf?src-supplier=Future+Electronics, ComponentLink11URL=https://datasheet.octopart.com:443/CC1210KKX7R9BB106-Yageo-datasheet-42079887.pdf?src-supplier=Future+Electronics, ComponentLink12Description=https://datasheet.octopart.com:443/CC1210KKX7R9BB106-Yageo-datasheet-27626582.pdf?src-supplier=Future+Electronics, ComponentLink12URL=https://datasheet.octopart.com:443/CC1210KKX7R9BB106-Yageo-datasheet-27626582.pdf?src-supplier=Future+Electronics, ComponentLink13Description=https://datasheet.octopart.com:443/CC1210KKX7R9BB106-Yageo-datasheet-10406438.pdf?src-supplier=Future+Electronics, ComponentLink13URL=https://datasheet.octopart.com:443/CC1210KKX7R9BB106-Yageo-datasheet-10406438.pdf?src-supplier=Future+Electronics, ComponentLink14Description=https://datasheet.octopart.com:443/CC1210KKX7R9BB106-Yageo-Group-datasheet-165992755.pdf?src-supplier=ODG+(Origin+Data+Global), ComponentLink14URL=https://datasheet.octopart.com:443/CC1210KKX7R9BB106-Yageo-Group-datasheet-165992755.pdf?src-supplier=ODG+(Origin+Data+Global), ComponentLink15Description=https://datasheet.octopart.com/Surface-Mount-Ceramic-Multilayer-Capacitors%3B-General-Purpose-%26-High-Capacitance-Class-2%2C-X7R-Yageo-datasheet-family-114.pdf, ComponentLink15URL=https://datasheet.octopart.com/Surface-Mount-Ceramic-Multilayer-Capacitors%3B-General-Purpose-%26-High-Capacitance-Class-2%2C-X7R-Yageo-datasheet-family-114.pdf, ComponentLink16Description=https://datasheet.octopart.com/CC1210KKX7R9BB106-Yageo-datasheet-10883670.pdf, ComponentLink16URL=https://datasheet.octopart.com/CC1210KKX7R9BB106-Yageo-datasheet-10883670.pdf, ComponentLink17Description=http://sigma.octopart.com:80/rohs_statement/Surface-Mount-Ceramic-Multilayer-Capacitors%3B-General-Purpose-%26-High-Capacitance-Class-2%2C-X7R-Yageo-family-124.pdf?src-supplier=Compliance+Statements, ComponentLink17URL=http://sigma.octopart.com:80/rohs_statement/Surface-Mount-Ceramic-Multilayer-Capacitors%3B-General-Purpose-%26-High-Capacitance-Class-2%2C-X7R-Yageo-family-124.pdf?src-supplier=Compliance+Statements, ComponentLink18Description=http://sigma.octopart.com:80/reach_statement/Surface-Mount-Ceramic-Multilayer-Capacitors%3B-General-Purpose-%26-High-Capacitance-Class-2%2C-X7R-Yageo-family-125.pdf?src-supplier=Compliance+Statements, ComponentLink18URL=http://sigma.octopart.com:80/reach_statement/Surface-Mount-Ceramic-Multilayer-Capacitors%3B-General-Purpose-%26-High-Capacitance-Class-2%2C-X7R-Yageo-family-125.pdf?src-supplier=Compliance+Statements, ComponentLink19Description=http://sigma.octopart.com:80/rohs_statement/Yageo-company-2.pdf?src-supplier=Compliance+Statements, ComponentLink19URL=http://sigma.octopart.com:80/rohs_statement/Yageo-company-2.pdf?src-supplier=Compliance+Statements, ComponentLink20Description=http://sigma.octopart.com:80/conflict_mineral_statement/Yageo-company-3.pdf?src-supplier=Compliance+Statements, ComponentLink20URL=http://sigma.octopart.com:80/conflict_mineral_statement/Yageo-company-3.pdf?src-supplier=Compliance+Statements, Halogen Free="Halogen Free", Height=2.5mm, Lead Free="Lead Free", Length=3.2mm, Lifecycle Status=Production, Manufacturer Part Number=CC1210KKX7R9BB106, Mounting Technology="Surface Mount", Number of Terminals=2, Packaging="Tape & Reel (TR)", Pricing="1=0.66, 10=0.412, 50=0.3138, 100=0.2835 (USD)", REACH SVHC=Yes, RoHS=Compliant, Schedule B="8532240020, 8532240020|8532240020, 8532240020|8532240020|8532240020, 8532240020|8532240020|8532240020|8532240020", Stock=63195, Supplier=DigiKey, Thickness=2.794mm, Voltage Rating (DC)=50V, Width=2.5mm
C6 C7: "22 µF ±20% 25V Ceramic Capacitor X7R 1210 (3225 Metric)", Manufacturer_Name=Murata, Copyright="Copyright (C) 2025 Ultra Librarian. All rights reserved.", Manufacturer_Part_Number=GRM32ER71E226ME15L, Type="Ceramic Capacitors"
D1: "Diode 40 V 3A Surface Mount DO-214AB (SMC)", Manufacturer_Name=onsemi, Copyright="Copyright (C) 2025 Ultra Librarian. All rights reserved.", Manufacturer_Part_Number=SS34, RefDes=RefDes, Type=Type
J1: "Connector Header Surface Mount, Right Angle 6 position 0.049\" (1.25mm)", Manufacturer_Name=JST, Copyright="Copyright (C) 2025 Ultra Librarian. All rights reserved.", Manufacturer_Part_Number=SM06B-GHS-TB, RefDes=RefDes, Type=Type
L1: "15 µH Shielded Drum Core, Wirewound Inductor 5 A 27mOhm Max Nonstandard", Manufacturer_Name="Bourns Electronics", Copyright="Copyright (C) 2025 Ultra Librarian. All rights reserved.", Manufacturer_Part_Number=SRR1260-150M
R1: "500 µOhms ±1% 3W Chip Resistor 2512 (6332 Metric) Anti-Sulfur, Automotive AEC-Q200, Current Sense, Moisture Resistant Metal Element", Manufacturer_Name=Yageo, Copyright="Copyright (C) 2025 Ultra Librarian. All rights reserved.", Manufacturer_Part_Number=PA2512FKE7T0U5E
R2: "Res Thick Film 0402 13.7K Ohm 1% 0.1W ±100ppm/°C Molded SMD Punched Carrier T/R", Case Code (Imperial)=0402, Manufacturer=Panasonic, Max Operating Temperature=155°C, Max Power Dissipation=100mW, Min Operating Temperature=-55°C, Supplier Part Number=P13.7KLCT-ND, Temperature Coefficient=100ppm/°C, Tolerance=1%, Voltage Rating=50V, Case/Package=0402, Category="Chip SMD Resistors", China RoHS=Non-Compliant, ComponentLink1Description=https://sigma.octopart.com:443/138766958/technical_drawing/Panasonic-ERJ-2RKF1372X.pdf?src-supplier=Upverter, ComponentLink1URL=https://sigma.octopart.com:443/138766958/technical_drawing/Panasonic-ERJ-2RKF1372X.pdf?src-supplier=Upverter, ComponentLink2Description=https://datasheet.octopart.com:443/ERJ-2RKF1372X-Panasonic-datasheet-82288794.pdf?src-supplier=Panasonic+SCT, ComponentLink2URL=https://datasheet.octopart.com:443/ERJ-2RKF1372X-Panasonic-datasheet-82288794.pdf?src-supplier=Panasonic+SCT, ComponentLink3Description=https://datasheet.octopart.com:443/ERJ-2RKF1372X-Panasonic-datasheet-48891056.pdf?src-supplier=Newark, ComponentLink3URL=https://datasheet.octopart.com:443/ERJ-2RKF1372X-Panasonic-datasheet-48891056.pdf?src-supplier=Newark, ComponentLink4Description=https://datasheet.octopart.com:443/ERJ-2RKF1372X-Panasonic-datasheet-136608610.pdf?src-supplier=Newark, ComponentLink4URL=https://datasheet.octopart.com:443/ERJ-2RKF1372X-Panasonic-datasheet-136608610.pdf?src-supplier=Newark, ComponentLink5Description=https://datasheet.octopart.com:443/ERJ-2RKF1372X-Panasonic-datasheet-33006990.pdf?src-supplier=Newark, ComponentLink5URL=https://datasheet.octopart.com:443/ERJ-2RKF1372X-Panasonic-datasheet-33006990.pdf?src-supplier=Newark, ComponentLink6Description=https://datasheet.octopart.com:443/ERJ-2RKF1372X-Panasonic---ECG-datasheet-21211697.pdf?src-supplier=Newark, ComponentLink6URL=https://datasheet.octopart.com:443/ERJ-2RKF1372X-Panasonic---ECG-datasheet-21211697.pdf?src-supplier=Newark, ComponentLink7Description=https://datasheet.octopart.com:443/ERJ-2RKF1372X-Panasonic-datasheet-13266541.pdf?src-supplier=Farnell, ComponentLink7URL=https://datasheet.octopart.com:443/ERJ-2RKF1372X-Panasonic-datasheet-13266541.pdf?src-supplier=Farnell, ComponentLink8Description=https://datasheet.octopart.com:443/ERJ-2RKF1372X-Panasonic---ECG-datasheet-15994758.pdf?src-supplier=Farnell, ComponentLink8URL=https://datasheet.octopart.com:443/ERJ-2RKF1372X-Panasonic---ECG-datasheet-15994758.pdf?src-supplier=Farnell, ComponentLink9Description=https://datasheet.octopart.com:443/ERJ-2RKF1372X-Panasonic---ECG-datasheet-10025800.pdf?src-supplier=Farnell, ComponentLink9URL=https://datasheet.octopart.com:443/ERJ-2RKF1372X-Panasonic---ECG-datasheet-10025800.pdf?src-supplier=Farnell, ComponentLink10Description=https://datasheet.octopart.com:443/ERJ-2RKF1372X-Panasonic---ECG-datasheet-8853621.pdf?src-supplier=Farnell, ComponentLink10URL=https://datasheet.octopart.com:443/ERJ-2RKF1372X-Panasonic---ECG-datasheet-8853621.pdf?src-supplier=Farnell, ComponentLink11Description=https://datasheet.octopart.com:443/ERJ-2RKF1372X-Panasonic---ECG-datasheet-5313456.pdf?src-supplier=Farnell, ComponentLink11URL=https://datasheet.octopart.com:443/ERJ-2RKF1372X-Panasonic---ECG-datasheet-5313456.pdf?src-supplier=Farnell, ComponentLink12Description=https://datasheet.octopart.com:443/ERJ-2RKF1372X-Panasonic-datasheet-154766169.pdf?src-supplier=JRH+Electronics, ComponentLink12URL=https://datasheet.octopart.com:443/ERJ-2RKF1372X-Panasonic-datasheet-154766169.pdf?src-supplier=JRH+Electronics, ComponentLink13Description=https://datasheet.octopart.com:443/ERJ2RKF1372X-Panasonic-datasheet-188592431.pdf?src-supplier=TME, ComponentLink13URL=https://datasheet.octopart.com:443/ERJ2RKF1372X-Panasonic-datasheet-188592431.pdf?src-supplier=TME, ComponentLink14Description=https://datasheet.octopart.com:443/ERJ2RKF1372X-Panasonic-datasheet-164353789.pdf?src-supplier=TME, ComponentLink14URL=https://datasheet.octopart.com:443/ERJ2RKF1372X-Panasonic-datasheet-164353789.pdf?src-supplier=TME, ComponentLink15Description=https://datasheet.octopart.com/ERJ-2RKF1372X-Panasonic-datasheet-78375410.pdf, ComponentLink15URL=https://datasheet.octopart.com/ERJ-2RKF1372X-Panasonic-datasheet-78375410.pdf, ComponentLink16Description=https://datasheet.octopart.com/Precision-Thick-Film-Chip-Resistors-Panasonic-datasheet-family-106.pdf, ComponentLink16URL=https://datasheet.octopart.com/Precision-Thick-Film-Chip-Resistors-Panasonic-datasheet-family-106.pdf, ComponentLink17Description=https://datasheet.octopart.com:443/ERJ-2RKF1372X-Panasonic-datasheet-118621.pdf?src-supplier=DigiKey, ComponentLink17URL=https://datasheet.octopart.com:443/ERJ-2RKF1372X-Panasonic-datasheet-118621.pdf?src-supplier=DigiKey, ComponentLink18Description=https://datasheet.octopart.com:443/ERJ-2RKF1372X-Panasonic-datasheet-41391857.pdf?src-supplier=Electro+Sonic, ComponentLink18URL=https://datasheet.octopart.com:443/ERJ-2RKF1372X-Panasonic-datasheet-41391857.pdf?src-supplier=Electro+Sonic, ComponentLink19Description=https://datasheet.octopart.com:443/ERJ-2RKF1372X-Panasonic-datasheet-38423196.pdf?src-supplier=Future+Electronics, ComponentLink19URL=https://datasheet.octopart.com:443/ERJ-2RKF1372X-Panasonic-datasheet-38423196.pdf?src-supplier=Future+Electronics, Composition="Thick Film", Contact Plating=Tin, Depth=500µm, Features="Automotive AEC-Q200", Height=350µm, Lead Free="Lead Free", Length=1mm, Lifecycle Status=Production, Manufacturer Part Number=ERJ-2RKF1372X, Military Standard=Not, Mounting Technology="Surface Mount", Number of Terminals=2, Number of Terminations=2, Packaging="Cut Tape", Power Dissipation=100mW, Power Rating=100mW, Pricing="1=0.1, 10=0.028, 25=0.0208, 50=0.0168, 100=0.0138, 250=0.01072, 500=0.009, 1000=0.00766, 5000=0.00554 (USD)", REACH SVHC=Yes, RoHS=Compliant, Schedule B="8533210045, 8533210045|8533210045|8533210045|8533210045|8533210045", Stock=67326, Supplier=DigiKey, Termination=SMD/SMT, Voltage Rating (DC)=50V, Weight=793.786648µg, Width=500µm, Working Voltage=50V
R3: "Res Thick Film 0402 1.5K Ohm 5% 0.1W(1/10W) +/-200ppm/ßC SMD Automotive T/R", Case Code (Imperial)=0402, Manufacturer=Panasonic, Max Operating Temperature=155°C, Max Power Dissipation=100mW, Min Operating Temperature=-55°C, Supplier Part Number=P1.5KJCT-ND, Temperature Coefficient=200ppm/°C, Tolerance=5%, Voltage Rating=50V, Case/Package=0402, Category="Chip SMD Resistors", ComponentLink1Description=https://sigma.octopart.com:443/138766958/technical_drawing/Panasonic-ERJ-2GEJ152X.pdf?src-supplier=Upverter, ComponentLink1URL=https://sigma.octopart.com:443/138766958/technical_drawing/Panasonic-ERJ-2GEJ152X.pdf?src-supplier=Upverter, ComponentLink2Description=https://datasheet.octopart.com:443/ERJ-2GEJ152X-Panasonic-datasheet-61114972.pdf?src-supplier=Newark, ComponentLink2URL=https://datasheet.octopart.com:443/ERJ-2GEJ152X-Panasonic-datasheet-61114972.pdf?src-supplier=Newark, ComponentLink3Description=https://datasheet.octopart.com:443/ERJ-2GEJ152X-Panasonic-datasheet-13266872.pdf?src-supplier=Newark, ComponentLink3URL=https://datasheet.octopart.com:443/ERJ-2GEJ152X-Panasonic-datasheet-13266872.pdf?src-supplier=Newark, ComponentLink4Description=https://datasheet.octopart.com:443/ERJ-2GEJ152X-Panasonic-datasheet-136608608.pdf?src-supplier=Newark, ComponentLink4URL=https://datasheet.octopart.com:443/ERJ-2GEJ152X-Panasonic-datasheet-136608608.pdf?src-supplier=Newark, ComponentLink5Description=https://datasheet.octopart.com:443/ERJ-2GEJ152X-Panasonic-datasheet-164353788.pdf?src-supplier=Newark, ComponentLink5URL=https://datasheet.octopart.com:443/ERJ-2GEJ152X-Panasonic-datasheet-164353788.pdf?src-supplier=Newark, ComponentLink6Description=https://datasheet.octopart.com:443/ERJ-2GEJ152X-Panasonic-datasheet-5314550.pdf?src-supplier=Jameco, ComponentLink6URL=https://datasheet.octopart.com:443/ERJ-2GEJ152X-Panasonic-datasheet-5314550.pdf?src-supplier=Jameco, ComponentLink7Description=https://datasheet.octopart.com:443/ERJ-2GEJ152X-Panasonic-datasheet-147443676.pdf?src-supplier=JRH+Electronics, ComponentLink7URL=https://datasheet.octopart.com:443/ERJ-2GEJ152X-Panasonic-datasheet-147443676.pdf?src-supplier=JRH+Electronics, ComponentLink8Description=https://datasheet.octopart.com:443/ERJ-2GEJ152X-Panasonic-datasheet-10554283.pdf?src-supplier=element14+APAC, ComponentLink8URL=https://datasheet.octopart.com:443/ERJ-2GEJ152X-Panasonic-datasheet-10554283.pdf?src-supplier=element14+APAC, ComponentLink9Description=https://datasheet.octopart.com:443/ERJ2GEJ152X-Panasonic-datasheet-165581512.pdf?src-supplier=TME, ComponentLink9URL=https://datasheet.octopart.com:443/ERJ2GEJ152X-Panasonic-datasheet-165581512.pdf?src-supplier=TME, ComponentLink10Description=https://datasheet.octopart.com:443/ERJ-2GEJ152X-Panasonic-datasheet-137472382.pdf?src-supplier=LKR, ComponentLink10URL=https://datasheet.octopart.com:443/ERJ-2GEJ152X-Panasonic-datasheet-137472382.pdf?src-supplier=LKR, ComponentLink11Description=https://datasheet.octopart.com/ERJ-2GEJ152X-Panasonic-datasheet-78375410.pdf, ComponentLink11URL=https://datasheet.octopart.com/ERJ-2GEJ152X-Panasonic-datasheet-78375410.pdf, ComponentLink12Description=https://datasheet.octopart.com/Thick-Film-Chip-Resistors-Panasonic-datasheet-family-105.pdf, ComponentLink12URL=https://datasheet.octopart.com/Thick-Film-Chip-Resistors-Panasonic-datasheet-family-105.pdf, ComponentLink13Description=https://datasheet.octopart.com:443/ERJ-2GEJ152X-Panasonic---ECG-datasheet-15994758.pdf?src-supplier=Farnell, ComponentLink13URL=https://datasheet.octopart.com:443/ERJ-2GEJ152X-Panasonic---ECG-datasheet-15994758.pdf?src-supplier=Farnell, ComponentLink14Description=https://datasheet.octopart.com:443/ERJ-2GEJ152X-Panasonic-datasheet-5313456.pdf?src-supplier=Farnell, ComponentLink14URL=https://datasheet.octopart.com:443/ERJ-2GEJ152X-Panasonic-datasheet-5313456.pdf?src-supplier=Farnell, ComponentLink15Description=https://datasheet.octopart.com:443/ERJ-2GEJ152X-Panasonic-datasheet-118598.pdf?src-supplier=DigiKey, ComponentLink15URL=https://datasheet.octopart.com:443/ERJ-2GEJ152X-Panasonic-datasheet-118598.pdf?src-supplier=DigiKey, ComponentLink16Description=https://datasheet.octopart.com:443/ERJ2GEJ152X-Panasonic-datasheet-27908757.pdf?src-supplier=Electro+Sonic, ComponentLink16URL=https://datasheet.octopart.com:443/ERJ2GEJ152X-Panasonic-datasheet-27908757.pdf?src-supplier=Electro+Sonic, ComponentLink17Description=https://datasheet.octopart.com:443/ERJ-2GEJ152X-Panasonic-datasheet-37173568.pdf?src-supplier=Electro+Sonic, ComponentLink17URL=https://datasheet.octopart.com:443/ERJ-2GEJ152X-Panasonic-datasheet-37173568.pdf?src-supplier=Electro+Sonic, Composition="Thick Film", Contact Plating=Tin, Depth=500µm, Features="Automotive AEC-Q200", Height=350µm, Length=1mm, Lifecycle Status=Production, Manufacturer Part Number=ERJ-2GEJ152X, Military Standard=Not, Mounting Technology="Surface Mount", Number of Terminals=2, Number of Terminations=2, Packaging="Cut Tape", Pins=2, Power Dissipation=100mW, Power Rating=100mW, Pricing="1=0.1, 10=0.026, 25=0.0192, 50=0.0154, 100=0.0125, 250=0.00932, 500=0.00808, 1000=0.00685, 5000=0.0049 (USD)", Radiation Hardening=No, REACH SVHC=Yes, RoHS=Compliant, Schedule B="8533210045, 8533210045|8533210045|8533210045|8533210045|8533210045", Stock=1074709, Supplier=DigiKey, Termination=SMD/SMT, Voltage Rating (DC)=50V, Weight=793.786648µg, Width=500µm, Working Voltage=50V
R4: "Res Thick Film 0402 100K Ohm 5% 0.1W(1/10W) +/-200ppm/ßC SMD Automotive T/R", Case Code (Imperial)=0402, Manufacturer=Panasonic, Max Operating Temperature=155°C, Max Power Dissipation=100mW, Min Operating Temperature=-55°C, Supplier Part Number=P100KJCT-ND, Temperature Coefficient=200ppm/°C, Tolerance=5%, Voltage Rating=50V, Case/Package=0402, Category="Chip SMD Resistors", China RoHS=Non-Compliant, ComponentLink1Description=https://datasheet.octopart.com:443/ERJ-2GEJ104X-Panasonic-datasheet-61114972.pdf?src-supplier=Newark, ComponentLink1URL=https://datasheet.octopart.com:443/ERJ-2GEJ104X-Panasonic-datasheet-61114972.pdf?src-supplier=Newark, ComponentLink2Description=https://datasheet.octopart.com:443/ERJ-2GEJ104X-Panasonic-datasheet-13266872.pdf?src-supplier=Newark, ComponentLink2URL=https://datasheet.octopart.com:443/ERJ-2GEJ104X-Panasonic-datasheet-13266872.pdf?src-supplier=Newark, ComponentLink3Description=https://datasheet.octopart.com:443/ERJ-2GEJ104X-Panasonic-datasheet-10554283.pdf?src-supplier=Newark, ComponentLink3URL=https://datasheet.octopart.com:443/ERJ-2GEJ104X-Panasonic-datasheet-10554283.pdf?src-supplier=Newark, ComponentLink4Description=https://datasheet.octopart.com:443/ERJ-2GEJ104X-Panasonic-datasheet-5314550.pdf?src-supplier=Jameco, ComponentLink4URL=https://datasheet.octopart.com:443/ERJ-2GEJ104X-Panasonic-datasheet-5314550.pdf?src-supplier=Jameco, ComponentLink5Description=https://datasheet.octopart.com:443/ERJ-2GEJ104X-Panasonic-datasheet-136608608.pdf?src-supplier=Farnell, ComponentLink5URL=https://datasheet.octopart.com:443/ERJ-2GEJ104X-Panasonic-datasheet-136608608.pdf?src-supplier=Farnell, ComponentLink6Description=https://datasheet.octopart.com:443/ERJ-2GEJ104X-Panasonic---ECG-datasheet-15994758.pdf?src-supplier=Farnell, ComponentLink6URL=https://datasheet.octopart.com:443/ERJ-2GEJ104X-Panasonic---ECG-datasheet-15994758.pdf?src-supplier=Farnell, ComponentLink7Description=https://datasheet.octopart.com:443/ERJ-2GEJ104X-Panasonic-datasheet-5313456.pdf?src-supplier=Farnell, ComponentLink7URL=https://datasheet.octopart.com:443/ERJ-2GEJ104X-Panasonic-datasheet-5313456.pdf?src-supplier=Farnell, ComponentLink8Description=https://datasheet.octopart.com:443/ERJ-2GEJ104X-Panasonic-datasheet-147443676.pdf?src-supplier=Master+Electronics, ComponentLink8URL=https://datasheet.octopart.com:443/ERJ-2GEJ104X-Panasonic-datasheet-147443676.pdf?src-supplier=Master+Electronics, ComponentLink9Description=https://datasheet.octopart.com:443/ERJ2GEJ104X-Panasonic-datasheet-165581512.pdf?src-supplier=TME, ComponentLink9URL=https://datasheet.octopart.com:443/ERJ2GEJ104X-Panasonic-datasheet-165581512.pdf?src-supplier=TME, ComponentLink10Description=https://datasheet.octopart.com/ERJ-2GEJ104X-Panasonic-datasheet-78375410.pdf, ComponentLink10URL=https://datasheet.octopart.com/ERJ-2GEJ104X-Panasonic-datasheet-78375410.pdf, ComponentLink11Description=https://datasheet.octopart.com:443/ERJ-2GEJ104X-Panasonic-datasheet-11480398.pdf?src-supplier=Arrow+Electronics, ComponentLink11URL=https://datasheet.octopart.com:443/ERJ-2GEJ104X-Panasonic-datasheet-11480398.pdf?src-supplier=Arrow+Electronics, ComponentLink12Description=https://datasheet.octopart.com:443/ERJ-2GEJ104X-Panasonic-datasheet-118655.pdf?src-supplier=DigiKey, ComponentLink12URL=https://datasheet.octopart.com:443/ERJ-2GEJ104X-Panasonic-datasheet-118655.pdf?src-supplier=DigiKey, ComponentLink13Description=https://datasheet.octopart.com:443/ERJ2GEJ104X-Panasonic-datasheet-27908757.pdf?src-supplier=Electro+Sonic, ComponentLink13URL=https://datasheet.octopart.com:443/ERJ2GEJ104X-Panasonic-datasheet-27908757.pdf?src-supplier=Electro+Sonic, ComponentLink14Description=https://datasheet.octopart.com:443/ERJ-2GEJ104X-Panasonic-datasheet-37173568.pdf?src-supplier=Electro+Sonic, ComponentLink14URL=https://datasheet.octopart.com:443/ERJ-2GEJ104X-Panasonic-datasheet-37173568.pdf?src-supplier=Electro+Sonic, Composition="Thick Film", Contact Plating=Tin, Depth=500µm, Features="Automotive AEC-Q200", Height=350µm, Length=1mm, Lifecycle Status=Production, Manufacturer Part Number=ERJ-2GEJ104X, Military Standard=Not, Mounting Technology="Surface Mount", Number of Terminals=2, Number of Terminations=2, Packaging="Cut Tape", Power Dissipation=100mW, Power Rating=100mW, Pricing="1=0.1, 10=0.026, 25=0.0192, 50=0.0154, 100=0.0125, 250=0.00968, 500=0.00808, 1000=0.00685, 5000=0.0049 (USD)", Radiation Hardening=No, REACH SVHC=Yes, RoHS=Compliant, Schedule B="8533210045, 8533210045|8533210045|8533210045|8533210045|8533210045|8533210045|8533210045|8533210045|8533210045|8533210045|8533210045|8533210045|8533210045|8533210045|8533210045|8533210045|8533210045|8533210045|8533210045|8533210045|8533210045|8533210045|8533210045|85", Stock=589546, Supplier=DigiKey, Termination=SMD/SMT, Voltage Rating (DC)=50V, Width=500µm, Working Voltage=50V